# Altium PCB hv_breakout.PcbDoc
Units mil, origin at the board's own origin, x right, y up, seen from the top; angles counter-clockwise.
Board outline 2875 x 840 mil, 2 copper layers (Top Layer, Bottom Layer); 11 components, 25 nets, 55 pads, 0 vias.
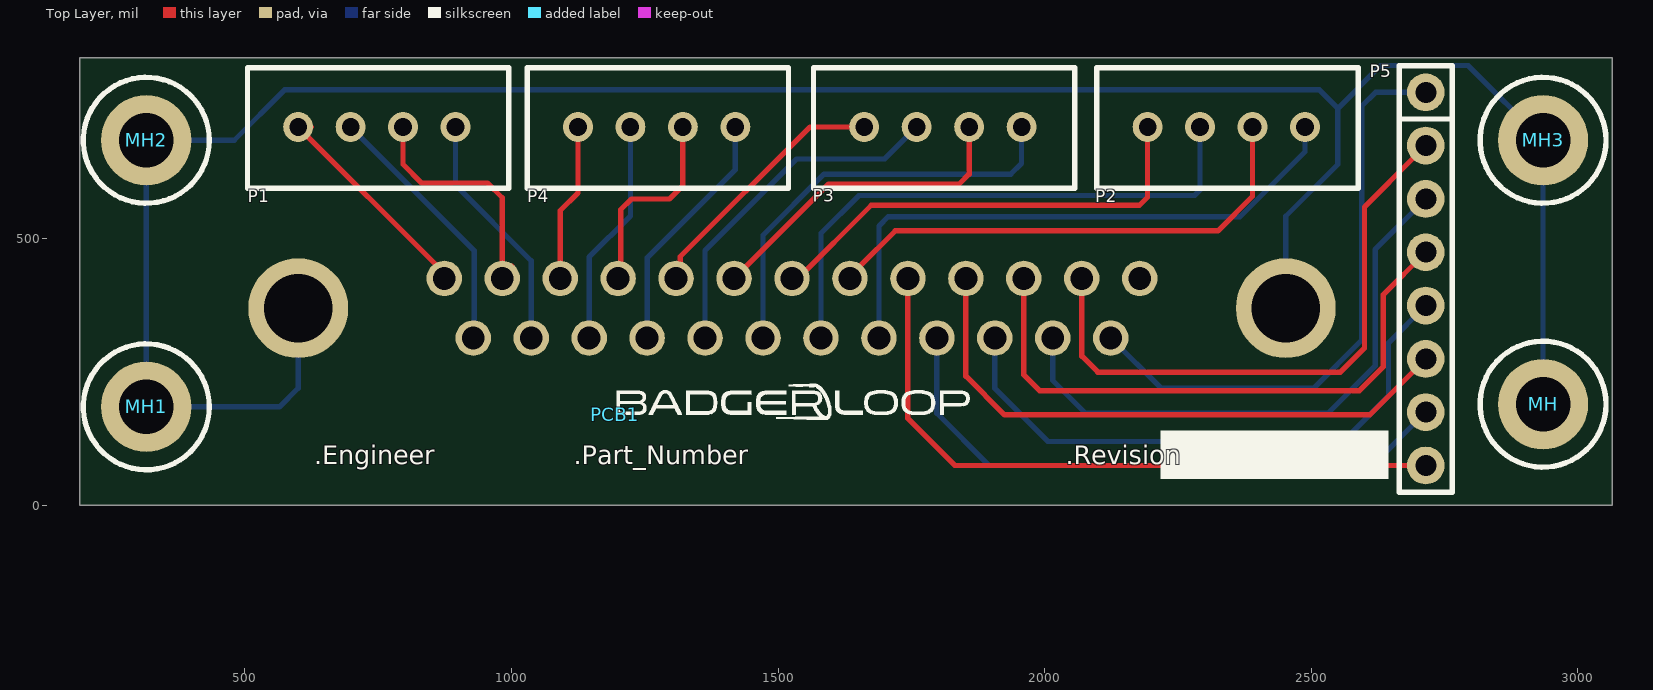
[diagram p0: Top Layer view]
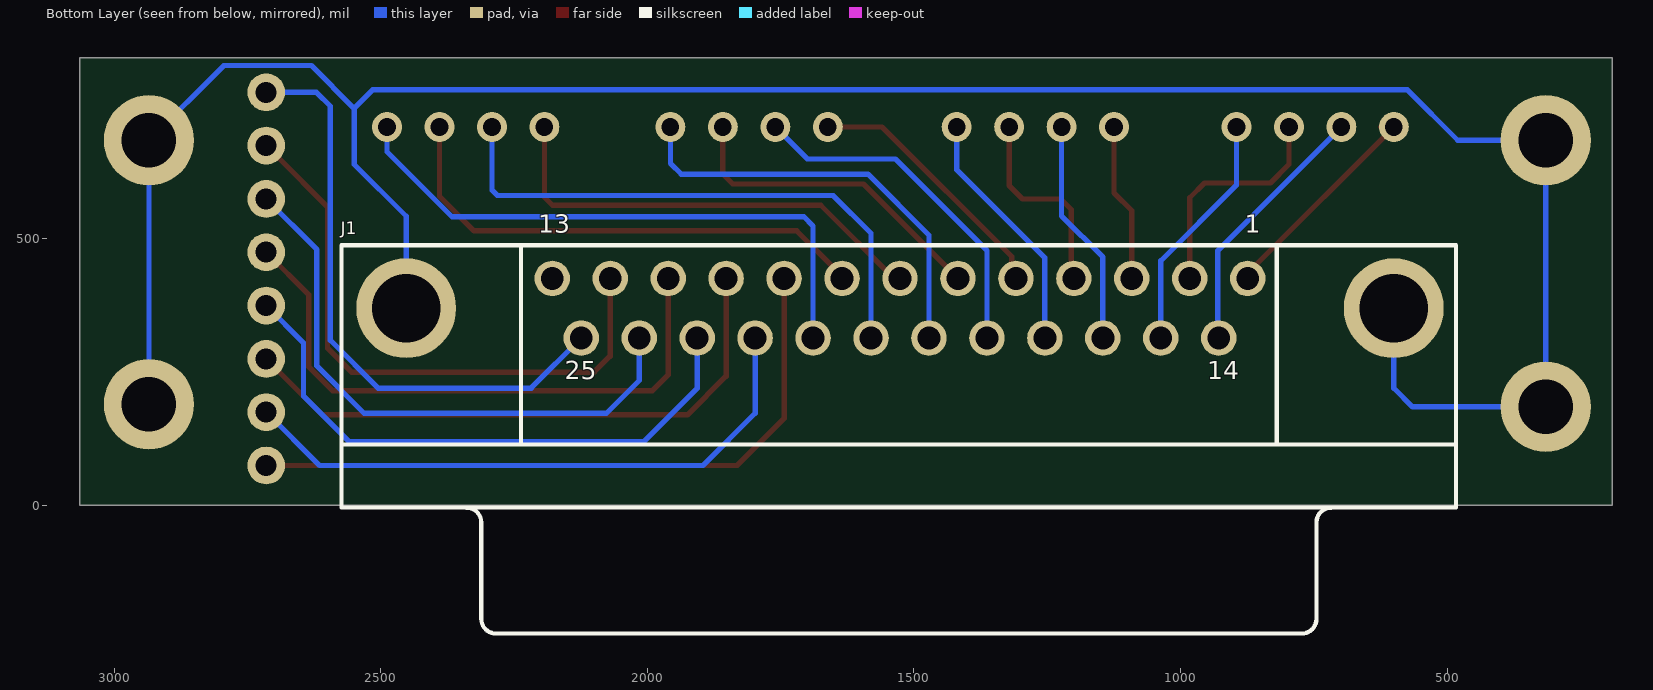
[diagram p1: Bottom Layer view, seen from below]

## Layer stack, top to bottom
Top Solder: solder mask 0.4, Solder Resist, Dk 3.5
Top Layer: signal copper 1.4
Dielectric 1: dielectric 12.6, FR-4, Dk 4.8
Bottom Layer: signal copper 1.4
Bottom Solder: solder mask 0.4, Solder Resist, Dk 3.5

## Board outline
190,0 3065,0 3065,840 190,840

## Design rules (kind name [scope] priority, off if disabled: settings)
Clearance [All] p1: gap=10 ignorepadtopadclearanceinfootprint=FALSE except(0: Arc-Hole Track-Hole SMDPad-Hole THPad-Hole Via-Hole Fill-Hole Poly-Hole Region-Hole Text-Hole)
HoleSize [All] p1: absolutevalues=TRUE maxlimit=500 minlimit=1 maxpercent=80.000 minpercent=20.000
PolygonConnect [All] p1: connectstyle=Relief reliefconductorwidth=10 reliefentries=4 polygonreliefangle="90 Angle" airgapwidth=10
RoutingVias [All] p1: holewidth=28 width=50 viastyle="Through Hole" minholewidth=28 minwidth=50 maxholewidth=28 maxwidth=50
SilkToSilkClearance [All] p1: silktosilkclearance=1
SilkToSolderMaskClearance [IsPad] p1: minsilkscreentomaskgap=1 clearancetoexposedcopper=TRUE
SolderMaskExpansion [All] p1: expansion=4
Width [All] p1: maxlimit=100 minlimit=10 preferedwidth=10 toplayer_maxwidth=10 minimp=50.000000 maximp=50.000000 favimp=50.000000
27 further rules are at their usual default settings.

## Classes and differential pairs
component class hv_breakout: J1 MH MH1 MH2 MH3 P1 P2 P3 P5

## Components (designator, comment, footprint, x,y, rotation, side; value= is the part's Value field where it differs from the comment)
J1 "D Connector 25" DSUB1.385-2H25A 1526.22,-4.02 r0 bottom
MH "4-40 Mount Hole" MH 2935,190 r0 top
MH1 "4-40 Mount Hole" MH 315,185 r0 top
MH2 "4-40 Mount Hole" MH 315,685 r0 top
MH3 "4-40 Mount Hole" MH 2935,685 r0 top
P1 "JST-XH Header" "JST - XH 4 POS" 599.74,710 r0 top
P2 "JST-XH Header" "JST - XH 4 POS" 2193.16,710 r0 top
P3 "JST-XH Header" "JST - XH 4 POS" 1661.58,710 r0 top
P4 "JST-XH Header" "JST - XH 4 POS" 1124.74,710 r0 top
P5 "Header 8" "Pin Header 1x8 TH Pitch 2.54mm" 2715,775 r270 top
PCB1 "PCB" PCB 1195.07,170 r0 top

## Footprints (in the part's own frame and the unit in brackets; to place one, negate y for a bottom-side part, rotate by r counter-clockwise, add the part's x,y. Pads: shape width x height; smd on the part's side, far side on the other; paste and mask are expansions set on the pad)
DSUB1.385-2H25A [mm] "Connector; D Subminiature; 25 Position; Right Angle; Pitch 1.385 mm"
  round 1.69 hole 1.09: 1(-16.566,-10.92) 2(-13.805,-10.92) 3(-11.044,-10.92) 4(-8.283,-10.92) 5(-5.522,-10.92) 6(-2.761,-10.92) 7(0,-10.92) 8(2.761,-10.92) 9(5.522,-10.92) 10(8.283,-10.92) 11(11.044,-10.92) 12(13.805,-10.92) 13(16.566,-10.92) 14(-15.185,-8.08) 15(-12.424,-8.08) 16(-9.663,-8.08) 17(-6.902,-8.08) 18(-4.141,-8.08) 19(-1.38,-8.08) 20(1.381,-8.08) 21(4.142,-8.08) 22(6.903,-8.08) 23(9.664,-8.08) 24(12.425,-8.08) 25(15.186,-8.08)
  round 4.76 hole 3.26: 26(-23.526,-9.5) 27(23.526,-9.5)
  silkscreen extent -26.5,-12.5 26.6,6, body extent -26.5,-12.41 26.54,8.09, height 12.62
"JST - XH 4 POS" [mil]
  round 56 hole 33: 1(0,0) 2(98.42,0) 3(196.84,0) 4(295.26,0)
  silkscreen extent -95,-115 395,111, body extent -90,-110 390,105, height 275
MH [mm] "#10 Mount Hole"
  round 4.3 hole 2.6: 2(0,0)
  silkscreen extent -3,-3 3,3, body extent -2.32,-2.58 2.32,2.07, height 2.84
PCB [mil]
  silkscreen extent 2,-9 665,58
"Pin Header 1x8 TH Pitch 2.54mm" [mm] "PinHeader 1x8 TH Pitch 2.54mm"
  round 1.8 hole 1: 1(0,0) 2(2.54,0) 3(5.08,0) 4(7.62,0) 5(10.16,0) 6(12.7,0) 7(15.24,0) 8(17.78,0)
  silkscreen extent -1.27,-1.27 19.05,1.27, body extent -1.27,-1.27 19.05,1.27, height 9.5

## Part data
J1: "Receptacle Assembly, 25 Position, Right Angle", PackageDocument=U, DatasheetDocument=19-Mar-1999, Gender=Receptacle, LatestRevisionDate=17-Jul-2002, LatestRevisionNote="Re-released for DXP Platform.", Orientation="Right Angle", PackageReference=787202, Positions=25, Published=15-Jun-2001, Publisher="Altium Limited"
P1 P2 P3 P4: "JST-XH CONN HEADER VERT 4POS 2.5MM", Manufacturer="JST Sales America", Manufacturer P/N=B4B-XH-A(LF)(SN), Digikey Link=https://www.digikey.com/product-detail/en/jst-sales-america-inc/B4B-XH-A-LF-SN/455-2249-ND/1651047, Digikey P/N=455-2249-ND
P5: "Header, 8-Pin", LatestRevisionDate=17-Jul-2002, LatestRevisionNote="Re-released for DXP Platform.", Publisher="Altium Limited"

## Nets (pads, with @x,y where several pads share a name; then routed paths per layer and width w, separated by ;. In a path a pad name is that pad's centre, name@x,y a point inside that pad or via, vN(x,y) a via of type N, cw(c..) or ccw(c..) an arc to the next point about the centre after c; other vN are vias at no path point)
GND: J1.26 J1.27 MH1.2 MH2.2 MH3.2 MH.2 | length 4742.7
  Top Layer w10: J1.26@600,330 J1.26 ; J1.27 J1.27@2452.44,447.44
  Bottom Layer w10: J1.26 600,220 565,185 MH1.2 MH2.2 480,685 575,780 2515,780 2550,745 ; J1.27 2452.44,542.44 2550,640 2550,745 ; MH.2 MH3.2 2794.57,825.43 2630.43,825.43 2550,745
NetJ1_1: J1.1 P1.1 | length 435
  Top Layer w10: P1.1@625,710 P1.1 864.8,444.94 874.02,444.94 J1.1@892.15,426.81
NetJ1_2: J1.2 P1.3 | length 455.8
  Top Layer w10: P1.3 796.58,639.99 831.57,605 955,605 982.72,577.28 J1.2 ; J1.2@1000.85,426.81 J1.2@1000.85,449.15
NetJ1_3: J1.3 P4.1 | length 297.9
  Top Layer w10: J1.3 1091.42,553 1124.74,586.32 P4.1
NetJ1_4: J1.4 P4.3 | length 378.8
  Top Layer w10: J1.4@1218.25,426.81 1205,440.06 1205,555 1225,575 1296.49,575 1321.58,600.09 P4.3
NetJ1_5: J1.5 P3.1 | length 489.7
  Top Layer w10: J1.5 1316.49,433.58 1316.49,466.49 1560,710 P3.1
NetJ1_6: J1.6 P3.3 | length 610.4
  Top Layer w10: J1.6 1594.71,603.1 1840,603.1 1858.42,621.52 P3.3
NetJ1_7: J1.7 P2.1 | length 861.8
  Top Layer w10: J1.7 1537.62,425.91 1674.81,563.1 2178.1,563.1 2193.16,578.16 P2.1
NetJ1_8: J1.8 P2.3 | length 942.9
  Top Layer w10: J1.8@1653.05,426.81 1653.05,448.13 1719.92,515 2325,515 2390,580 P2.3
NetJ1_9: J1.9 P5.8 | length 1279.1
  Top Layer w10: J1.9@1761.75,426.81 1743.62,408.68 1743.62,163.13 1831.75,75 P5.8
NetJ1_10: J1.10 P5.6 | length 1127.9
  Top Layer w10: J1.10@1870.45,426.81 1852.32,408.68 1852.32,242.68 1925,170 2610,170 P5.6
NetJ1_11: J1.11 P5.4 | length 1142.5
  Top Layer w10: J1.11@1979.15,426.81 1961.02,408.68 1961.02,245 1991.02,215 2590,215 2635,260 2635,395 P5.4
NetJ1_12: J1.12 P5.2 | length 1139.7
  Top Layer w10: J1.12@2087.85,426.81 2070,408.96 2070,280 2100,250 2555,250 2600,295 2600,560 2695.12,655.12 2695.12,679.88 P5.2@2695,680
NetJ1_14: J1.14 P1.2 | length 497.9
  Bottom Layer w10: P1.2 758.16,650 758.28,650 912.15,496.14 912.15,496.01 930,478.16 930,331.5 J1.14@946.5,315
NetJ1_15: J1.15 P1.4 | length 461.4
  Bottom Layer w10: P1.4 895,600.92 1037.07,458.85 1037.07,333.13 J1.15@1055.2,315
NetJ1_16: J1.16 P4.2 | length 434.6
  Bottom Layer w10: J1.16@1163.9,315 1145.77,333.13 1145.77,465.77 1223.16,543.16 P4.2
NetJ1_17: J1.17 P4.4 | length 471.1
  Bottom Layer w10: J1.17@1272.6,315 1254.47,333.13 1254.47,464.47 1420,630 P4.4
NetJ1_18: J1.18 P3.2 | length 663.5
  Bottom Layer w10: J1.18@1381.3,315 1363.17,333.13 1363.17,478.17 1535,650 1700,650 P3.2
NetJ1_19: J1.19 P3.4 | length 808.4
  Bottom Layer w10: J1.19@1490,315 1471.87,333.13 1471.87,506.87 1586.58,621.58 1936.58,621.58 1956.84,641.84 P3.4
NetJ1_20: J1.20 P2.2 | length 1066.1
  Bottom Layer w10: J1.20@1598.7,315 1580.57,333.13 1580.57,510.57 1651.58,581.58 2281.58,581.58 2291.58,591.58 P2.2
NetJ1_21: J1.21 P2.4 | length 1120.1
  Bottom Layer w10: J1.21@1707.4,315 1689.27,333.13 1689.27,524.27 1706.58,541.58 2366.58,541.58 2488.42,663.42 P2.4
NetJ1_22: J1.22 P5.7 | length 1152.7
  Top Layer w10: J1.22@1816.1,315 J1.22@1825,306.1
  Bottom Layer w10: J1.22 1797.97,172.97 1895.94,75 2615,75 P5.7
NetJ1_23: J1.23 P5.5 | length 1108.4
  Bottom Layer w10: J1.23 1906.67,219.35 2006.02,120 2560,120 2645,205 2645,305 P5.5
NetJ1_24: J1.24 P5.3 | length 1099
  Bottom Layer w10: J1.24 2015.37,234.63 2077.03,172.97 2531.26,172.97 2620,261.72 2620,480 P5.3
NetJ1_25: J1.25 P5.1 | length 1117
  Bottom Layer w10: J1.25 2218.17,220 2505,220 2595,310 2595,749.14 2620.86,775 P5.1
pads on no net: J1.13

## Silkscreen, mask and mechanical layers (free items; w line width, h text height)
Top Overlay:
  region: 2645,50.23 2217.5,49.87 2217.5,140 2645,140
  text ".Engineer" at 630,65 h60
  text ".Part_Number" at 1116.85,65 h60
  text ".Revision" at 2040,65 h60
Mechanical 3:
  the board outline again, w10
Mechanical 15:
  the board outline again, w10
Mechanical 16:
  drawing of 237 lines, arcs and shapes, not listed
  text "1" at 703.84,7462.5 h70
  text "2" at 3199.5,7462.5 h70
  text "3" at 5688.84,7462.5 h70
  text "4" at 8195.51,7462.5 h70
  text "A" at -452.5,6865 h70
  text "A" at 10190,6865 h70
  text "Layer" at -64.26,5840 h60
  text "Name" at 345.65,5840 h60
  text "Material" at 1275.4,5840 h60
  text "Thickness" at 2135.16,5840 h60
  text "Constant" at 2785,5840 h60
  text "Board Layer Stack" at 3354.86,5840 h60
  text "1" at -64.26,5720 h60
  text "Top Overlay" at 345.65,5720 h60
  text "2" at -64.26,5600 h60
  text "Top Solder" at 345.65,5600 h60
  text "Solder Resist" at 1275.4,5600 h60
  text "0.40mil" at 2135.16,5600 h60
  text "3.5" at 2785,5600 h60
  text "3" at -64.26,5480 h60
  text "Top Layer" at 345.65,5480 h60
  text "Copper" at 1275.4,5480 h60
  text "1.40mil" at 2135.16,5480 h60
  text "4" at -64.26,5360 h60
  text "Dielectric 1" at 345.65,5360 h60
  text "FR-4" at 1275.4,5360 h60
  text "12.60mil" at 2135.16,5360 h60
  text "4.8" at 2785,5360 h60
  text "5" at -64.26,5240 h60
  text "Bottom Layer" at 345.65,5240 h60
  text "Copper" at 1275.4,5240 h60
  text "1.40mil" at 2135.16,5240 h60
  text "6" at -64.26,5120 h60
  text "Bottom Solder" at 345.65,5120 h60
  text "Solder Resist" at 1275.4,5120 h60
  text "0.40mil" at 2135.16,5120 h60
  text "3.5" at 2785,5120 h60
  text "7" at -64.26,5000 h60
  text "Bottom Overlay" at 345.65,5000 h60
  text "B" at 10187.5,4992 h70
  text "B" at -452.5,4939.5 h70
  text "C" at 10187.5,2617 h70
  text "C" at -452.5,2564.5 h70
  text "1.      PCB must be 0.030\" thick +/- 10% / 2.      Board Size: / 3.      Electrical Test / 4.      Coloring: / a.      Green Solder Mask Top / b.      Green Solder Mask Bottom / c.      White Silkscreen Top / d.      White Silkscreen Bottom / 5.      Via annular ring clearance is 10mil minimum / 6.     All holes are plated through holes" at 6860,2120 h150
  text "ENGINEER:" at 5662.5,402.5 h45
  text "TITLE:" at 7162.5,402.5 h45
  text ".Engineer" at 5702.5,280.35 h110
  text "D" at 10187.5,247 h70
  text "D" at -452.5,194.5 h70
  text ".PCB_FILE_NAME_NO_PATH" at 7257.5,154.78 h200
  text "PCB DESIGNER:" at 5662.5,107.5 h45
  text ".Designer" at 5697.5,-22.5 h110
  text "DATE:" at 5662.5,-197.5 h45
  text "PART NO.:" at 7162.5,-197.5 h45
  text "REV:" at 9262.5,-197.5 h45
  text "Badgerloop" at 4362.5,-297.5 h110
  text ".PRINT_DATE" at 5712.5,-317.5 h110
  text ".Part_Number" at 7232.5,-322.5 h110
  text ".Revision" at 9272.5,-322.5 h110
  text "ERB Room 133" at 4362.5,-397.5 h110
  text "1400 Engineering Drive" at 4362.5,-497.5 h110
  text "FILE NAME:" at 5662.5,-497.5 h45
  text "DWG NO:" at 7162.5,-497.5 h45
  text "SCALE:" at 9262.5,-497.5 h45
  text "Madison, WI 53706" at 4362.5,-597.5 h110
  text ".PCB_FILE_NAME_NO_PATH" at 5712.5,-617.5 h110
  text "1:1" at 9277.5,-622.5 h110
  text "1" at 703.84,-837.5 h70
  text "2" at 3199.5,-837.5 h70
  text "3" at 5688.84,-837.5 h70
  text "4" at 8195.51,-837.5 h70
Drill Drawing:
  lines w10: -92.71,6379.17 -76.04,6379.17 -59.38,6362.5 -42.71,6379.17 -26.04,6379.17 -42.71,6395.83 -26.04,6412.5 -42.71,6412.5 -59.38,6429.17 -76.04,6412.5 -92.71,6412.5 -76.04,6395.83 -92.71,6379.17 ; -92.71,6529.17 -76.04,6529.17 -76.04,6512.5 -42.71,6512.5 -42.71,6529.17 -26.04,6529.17 -26.04,6562.5 -42.71,6562.5 -42.71,6579.17 -76.04,6579.17 -76.04,6562.5 -92.71,6562.5 -92.71,6529.17 ; -92.71,6729.17 -26.04,6729.17 -59.38,6662.5 -92.71,6729.17 ; -92.71,6812.5 -59.38,6829.17 -26.04,6812.5 -42.71,6845.83 -26.04,6879.17 -59.38,6862.5 -92.71,6879.17 -76.04,6845.83 -92.71,6812.5 ; -92.71,6962.5 -26.04,6962.5 -26.04,7029.17 -92.71,7029.17 -92.71,6962.5
  lines w15: -152.5,6317.5 6857.6,6317.5 ; -152.5,7067.5 6857.6,7067.5 ; 398.38,6167.5 398.38,7217.5 ; 938.24,6167.5 938.24,7217.5 ; 2087.9,6167.5 2087.9,7217.5 ; 2593.78,6167.5 2593.78,7217.5 ; 3327.58,6167.5 3327.58,7217.5 ; 4827.13,6167.5 4827.13,7217.5 ; 5416.98,6167.5 5416.98,7217.5 ; 6162.78,6167.5 6162.78,7217.5 ; -152.5,6167.5 6857.6,6167.5 6857.6,7217.5 -152.5,7217.5 -152.5,6167.5
  text "Symbol" at -62.5,7112.5 h72
  text "Count" at 443.38,7112.5 h72
  text "Hole Size" at 983.24,7112.5 h72
  text "Plated" at 2132.9,7112.5 h72
  text "Hole Type" at 2638.78,7112.5 h72
  text "Drill Layer Pair" at 3372.58,7112.5 h72
  text "Via/Pad" at 4872.13,7112.5 h72
  text "Pad Shape" at 5461.98,7112.5 h72
  text "Template" at 6207.78,7112.5 h72
  text "16" at 443.38,6962.5 h60
  text "33.00mil (0.838mm)" at 983.24,6962.5 h60
  text "PTH" at 2132.9,6962.5 h60
  text "Round" at 2638.78,6962.5 h60
  text "Top Layer - Bottom Layer" at 3372.58,6962.5 h60
  text "Pad" at 4872.13,6962.5 h60
  text "Rounded" at 5461.98,6962.5 h60
  text "c142h84" at 6207.78,6962.5 h60
  text "8" at 443.38,6812.5 h60
  text "39.37mil (1.000mm)" at 983.24,6812.5 h60
  text "PTH" at 2132.9,6812.5 h60
  text "Round" at 2638.78,6812.5 h60
  text "Top Layer - Bottom Layer" at 3372.58,6812.5 h60
  text "Pad" at 4872.13,6812.5 h60
  text "Rounded" at 5461.98,6812.5 h60
  text "c180h100" at 6207.78,6812.5 h60
  text "25" at 443.38,6662.5 h60
  text "42.91mil (1.090mm)" at 983.24,6662.5 h60
  text "PTH" at 2132.9,6662.5 h60
  text "Round" at 2638.78,6662.5 h60
  text "Top Layer - Bottom Layer" at 3372.58,6662.5 h60
  text "Pad" at 4872.13,6662.5 h60
  text "Rounded" at 5461.98,6662.5 h60
  text "c169h109" at 6207.78,6662.5 h60
  text "4" at 443.38,6512.5 h60
  text "102.36mil (2.600mm)" at 983.24,6512.5 h60
  text "PTH" at 2132.9,6512.5 h60
  text "Round" at 2638.78,6512.5 h60
  text "Top Layer - Bottom Layer" at 3372.58,6512.5 h60
  text "Pad" at 4872.13,6512.5 h60
  text "Rounded" at 5461.98,6512.5 h60
  text "c430h260" at 6207.78,6512.5 h60
  text "2" at 443.38,6362.5 h60
  text "128.35mil (3.260mm)" at 983.24,6362.5 h60
  text "PTH" at 2132.9,6362.5 h60
  text "Round" at 2638.78,6362.5 h60
  text "Top Layer - Bottom Layer" at 3372.58,6362.5 h60
  text "Pad" at 4872.13,6362.5 h60
  text "Rounded" at 5461.98,6362.5 h60
  text "c476h326" at 6207.78,6362.5 h60
  text "55 Total" at 443.38,6212.5 h60

## Text inside footprints (layer, text, board x,y; h text height)
J1: Bottom Overlay "25" at 2155,225.91 h59.06; Bottom Overlay "14" at 950,225.65 h59.06; Bottom Overlay "13" at 2205,500 h59.06; Bottom Overlay "1" at 880,500 h59.06